# EAGLE board tail (EAGLE 9.3.2)
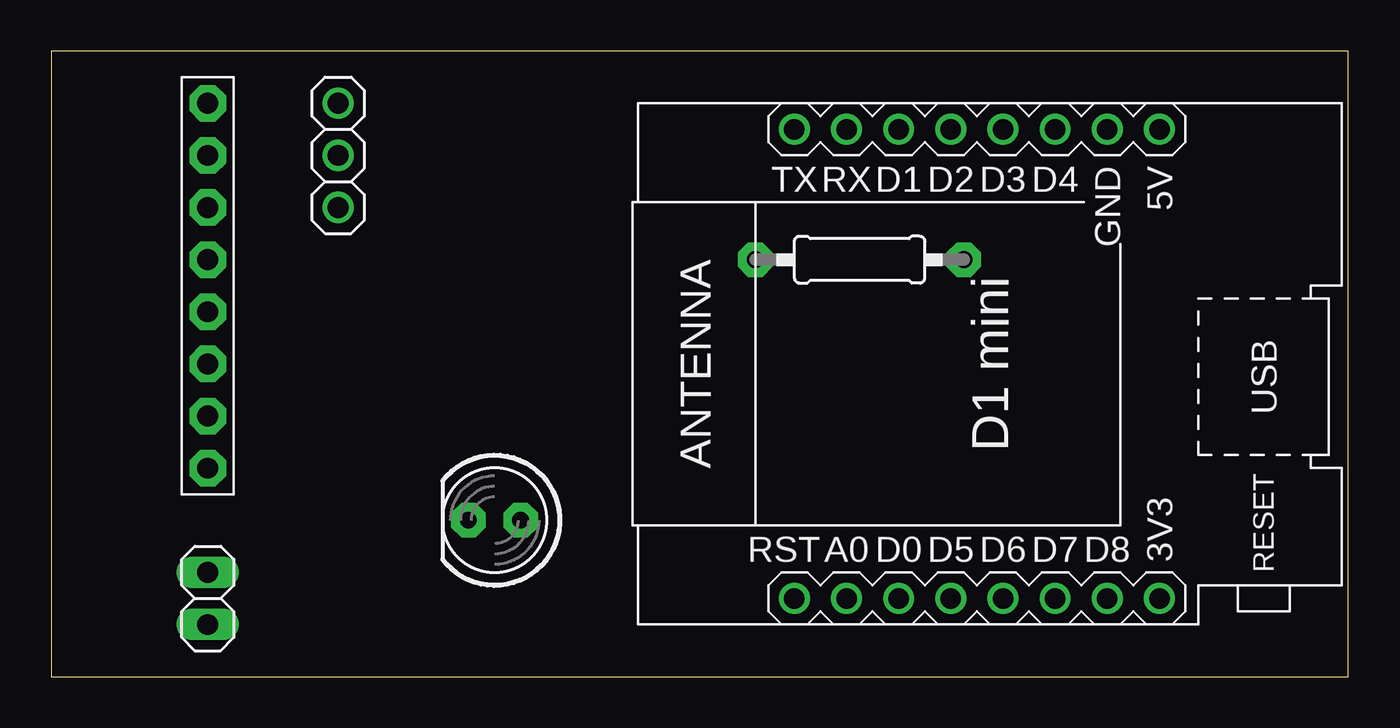
[diagram p0: board, top side]
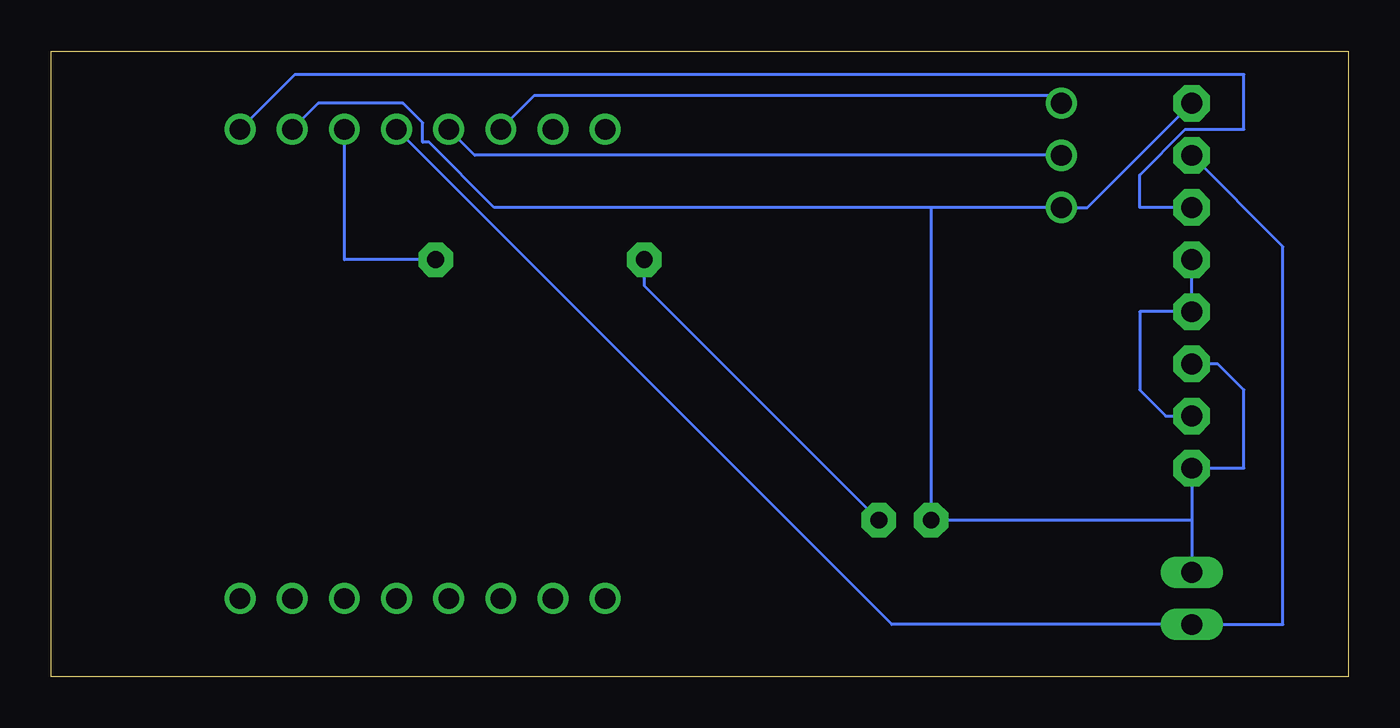
[diagram p1: board, bottom side, seen from below]

Size 63.17 x 30.47 mm. Coordinates in mm from the lower left corner, seen from the top.
Outline: 0,0 63.17,0 63.17,30.47 0,30.47 0,0
Copper layers (1*16): Top 0.035mm / dielectric 1.5mm / Bottom 0.035mm
Design rules "default": minimum track width 6mil, minimum drill 0.35mm, track to track 6mil, track to pad 6mil, pad to pad 6mil, via to via 6mil, smd to smd 6mil, copper to edge 40mil, drill to drill 6mil, minimum pad ring 10mil, minimum via ring 8mil, stop-mask expansion 4mil, vias tented up to drill 0mil, thermal gap 10mil

## Footprints (pad centres in the part's own frame; a part is rotated, then mirrored left to right if it is on the bottom)
1X08-BIG = drill 1.016 pad 1.778 octagon: 1 -8.89,0; 2 -6.35,0; 3 -3.81,0; 4 -1.27,0; 5 1.27,0; 6 3.81,0; 7 6.35,0; 8 8.89,0
1X03 = drill 1.016: 1 -2.54,0; 2 0,0; 3 2.54,0
1X02 = drill 1.016 long: 1 -1.27,0; 2 1.27,0
LED5MM = drill 0.813 pad 1.676 octagon: A -1.27,0; K 1.27,0
0207/10 = drill 0.813 pad 1.676 octagon: 1 -5.08,0; 2 5.08,0
WEMOS-D1-MINI = drill 1: JP1.1 -11.43,9.525; JP1.2 -11.43,6.985; JP1.3 -11.43,4.445; JP1.4 -11.43,1.905; JP1.5 -11.43,-0.635; JP1.6 -11.43,-3.175; JP1.7 -11.43,-5.715; JP1.8 -11.43,-8.255; JP2.1 11.43,9.525; JP2.2 11.43,6.985; JP2.3 11.43,4.445; JP2.4 11.43,1.905; JP2.5 11.43,-0.635; JP2.6 11.43,-3.175; JP2.7 11.43,-5.715; JP2.8 11.43,-8.255

## Placement (x,y rotation side)
JP1  [1X08-BIG]  7.62,19.05 90 top
JP2  [1X03]  13.97,25.4 90 top
JP3  [1X02]  7.62,3.81 90 top
LED3  [LED5MM]  21.59,7.62 180 top
R4  1K  [0207/10]  39.37,20.32 0 top
W1  WEMOS-D1-MINI  [WEMOS-D1-MINI]  45.72,15.24 90 top

## Library data of the parts
JP1 JP2 LED3 R4 = adafruit
JP3 = DC_LOAD_AU
W1 = diy-modules

## Nets
0: JP1.1 JP1.3 JP1.8 JP2.1 JP3.2 LED3.K W1.JP2.7
3V3: W1.JP1.8
N$2: JP2.2 W1.JP2.4
N$3: JP2.3 W1.JP2.3
N$4: JP1.2 JP1.4 JP1.5
N$6: JP1.6 W1.JP2.8
N$8: R4.2 W1.JP2.6
N$9: LED3.A R4.1
N$10: JP1.7 JP3.1 W1.JP2.5

## Tracks (layer width: path | path; a pad name or v marks a point on that pad's centre or on a via)
0
  Bottom 0.152: 7.62,7.62 JP1.1 5.08,10.16 5.08,13.97 6.35,15.24 JP1.3 | 7.62,7.62 JP3.2 | 7.62,7.62 LED3.K 20.32,22.86 | W1.JP2.7 50.16,27.94 46.04,27.94 45.09,26.99 45.09,26.03 44.77,26.03 41.59,22.86 20.32,22.86 | 20.32,22.86 JP2.1 12.7,22.86 JP1.8
N$2
  Bottom 0.152: W1.JP2.4 42.55,25.4 JP2.2
N$3
  Bottom 0.152: W1.JP2.3 39.62,28.32 14.35,28.32 JP2.3
N$4
  Bottom 0.152: JP1.2 8.89,12.7 10.16,13.97 10.16,17.78 JP1.4 JP1.5
N$6
  Bottom 0.152: W1.JP2.8 51.31,29.34 5.08,29.34 5.08,26.67 7.94,26.67 10.16,24.45 10.16,22.86 JP1.6
N$8
  Bottom 0.152: W1.JP2.6 48.9,20.32 R4.2
N$9
  Bottom 0.152: LED3.A 34.29,19.05 R4.1
N$10
  Bottom 0.152: W1.JP2.5 22.23,2.54 JP3.1 3.17,2.54 3.17,20.95 JP1.7

## Text on the board
tValues: BTN JMP +5 G +5 G